# Altium PCB ECE8873_sample.PcbDoc
Units mm, origin at the board's own origin, x right, y up, seen from the top; angles counter-clockwise.
Board outline 48.86 x 38.55 mm, 2 copper layers (Top Layer, Bottom Layer); 24 components, 17 nets, 162 pads, 46 vias.
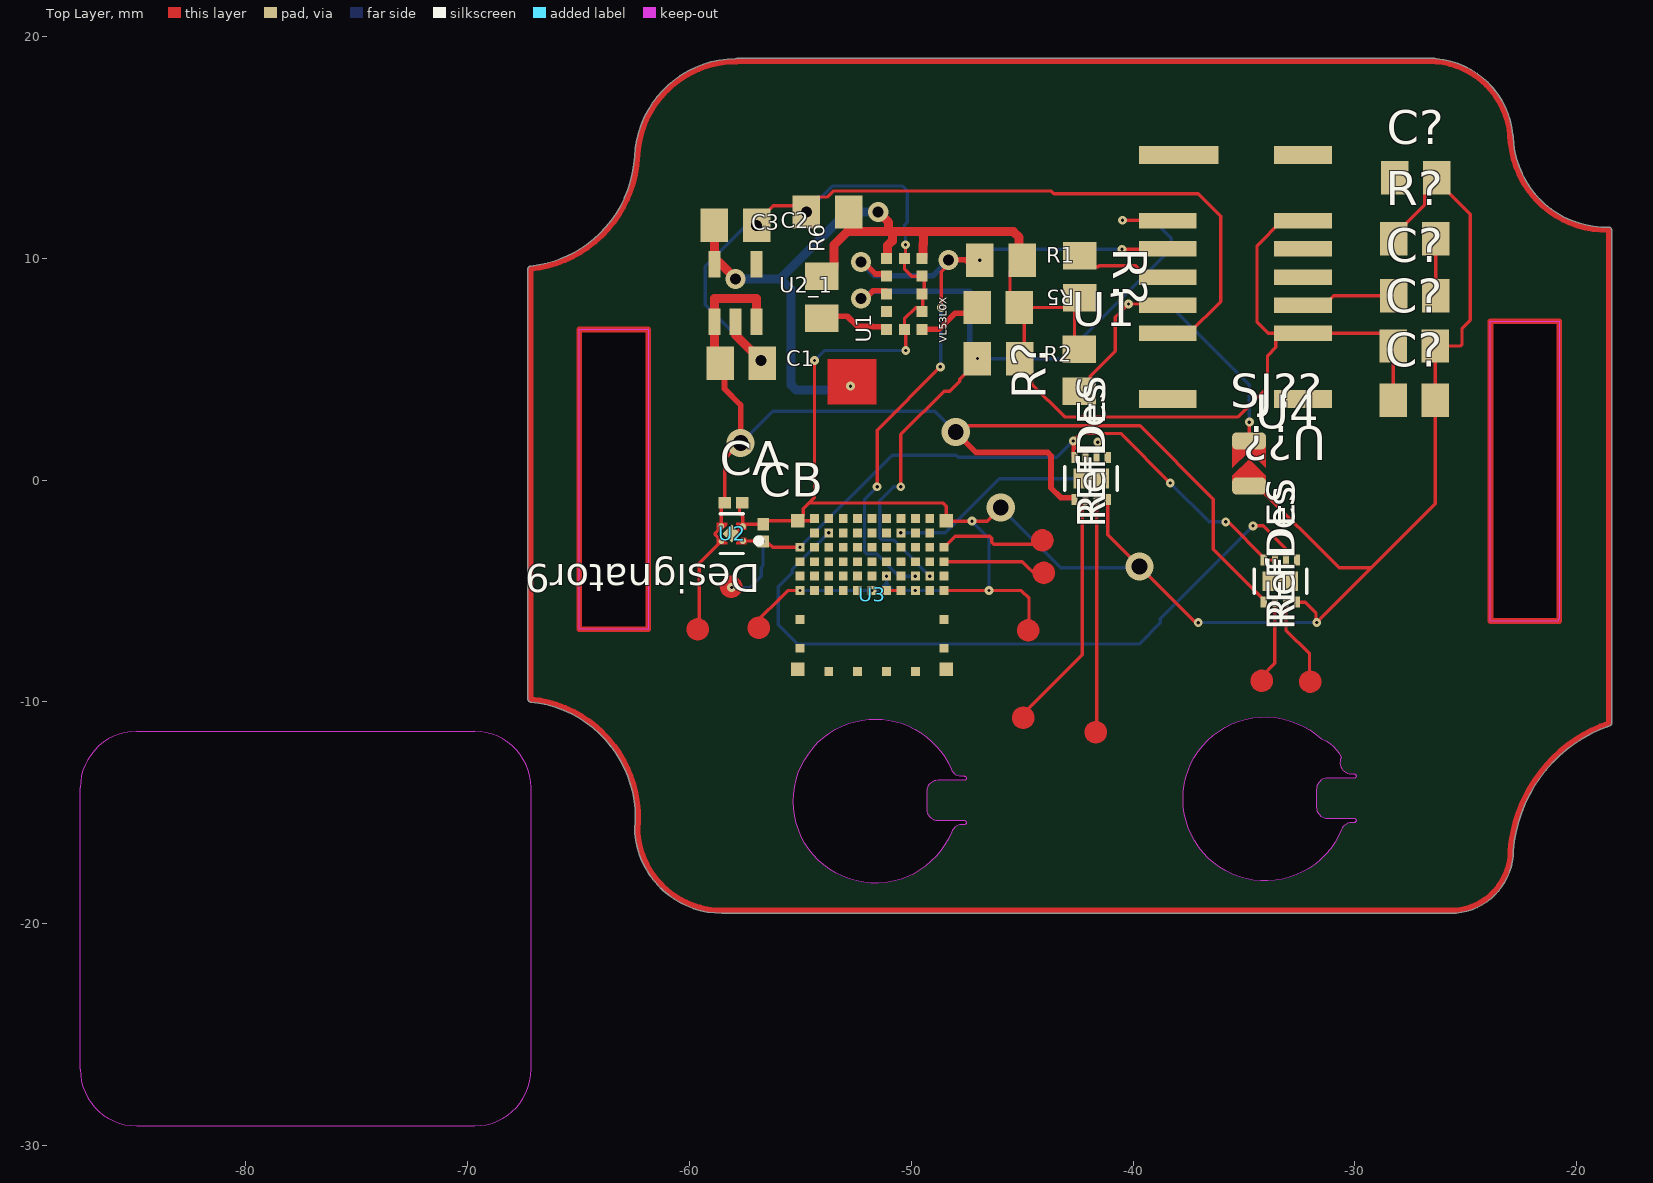
[diagram p0: Top Layer view]
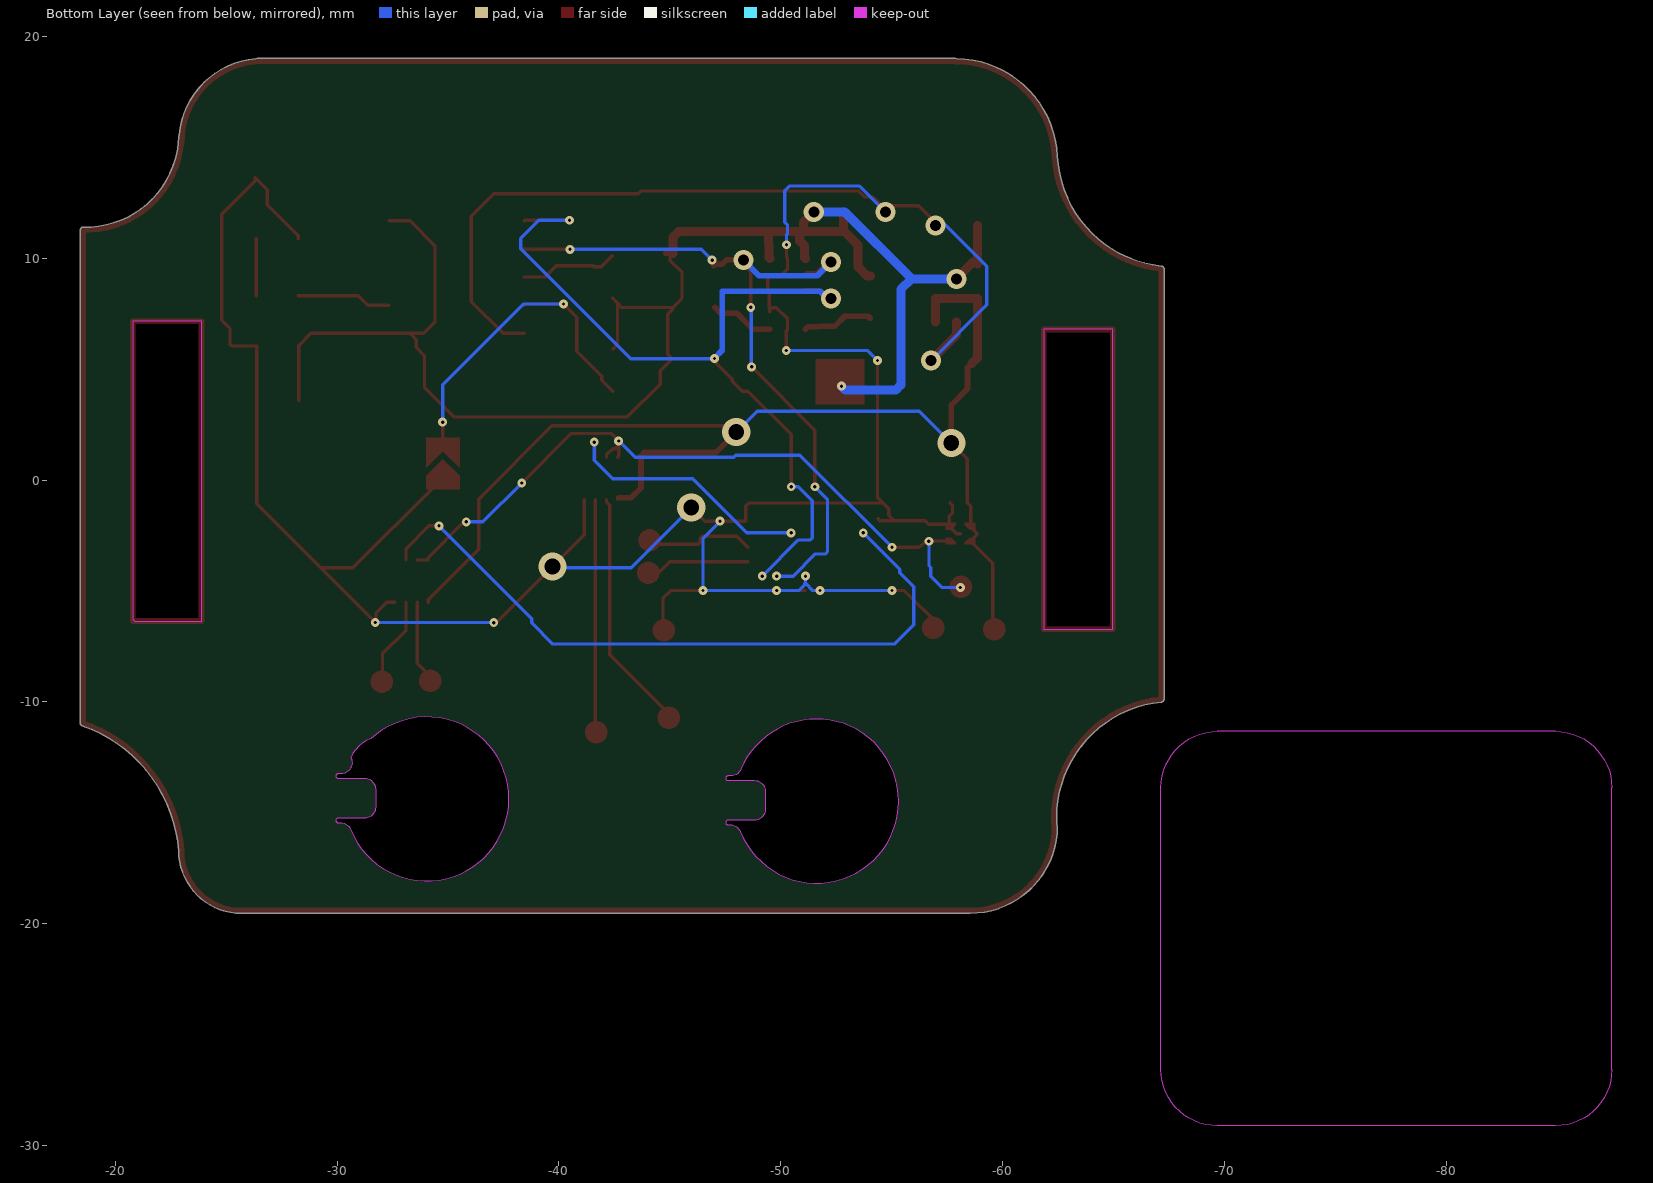
[diagram p1: Bottom Layer view, seen from below]

## Layer stack, top to bottom
Top Solder: solder mask 0.0102, Solder Resist, Dk 3.5
Top Layer: signal copper 0.0356
Dielectric 1: dielectric 0.32, FR-4, Dk 4.8
Bottom Layer: signal copper 0.0356
Bottom Solder: solder mask 0.0102, Solder Resist, Dk 3.5

## Board outline
-62.438,-15.219 ccw(c-67.678,-15.219) -67.164,-10.003 cw(c-67.152,-9.876) -67.279,-9.876 -67.279,9.521 cw(c-67.152,9.521) -67.164,9.648 ccw(c-67.715,14.868) -62.472,14.603 cw(c-57.866,14.386) -57.935,18.997 -57.866,19.017 -26.403,19.017 -26.336,18.998 cw(c-26.661,15.218) -22.882,15.56 -22.862,15.494 ccw(c-18.664,15.599) -18.56,11.401 cw(c-18.556,11.274) -18.429,11.274 -18.429,-10.91 -18.422,-10.949 cw(c-18.55,-10.949) -18.508,-11.07 ccw(c-16.368,-17.223) -22.862,-16.71 cw(c-25.687,-16.705) -25.687,-19.53 -25.722,-19.525 -58.539,-19.525 cw(c-58.539,-15.592) -62.472,-15.592 -62.446,-15.514 ccw(c-67.677,-15.219)
cut-out: -64.965,6.792 -61.863,6.792 -61.863,-6.726 -64.965,-6.726
cut-out: -23.891,7.164 -20.789,7.164 -20.789,-6.249 -20.784,-6.254 -20.884,-6.354 -23.891,-6.354
cut-out: -31.236,-15.241 -30.045,-15.241 cw(c-30.045,-15.341) -29.945,-15.341 cw(c-30.045,-15.341) -30.045,-15.441 -30.148,-15.441 ccw(c-30.148,-15.941) -30.612,-15.754 cw(c-34.045,-14.372) -35.245,-10.872 cw(c-34.045,-14.372) -31.52,-11.668 cw(c-32.009,-13.096) -30.618,-12.509 ccw(c-30.174,-12.741) -30.174,-13.241 -30.045,-13.241 cw(c-30.045,-13.341) -29.945,-13.341 cw(c-30.045,-13.341) -30.045,-13.441 -31.236,-13.441 ccw(c-31.236,-13.941) -31.736,-13.941 -31.736,-14.741 ccw(c-31.236,-14.741)
cut-out: -48.807,-15.338 -47.617,-15.338 cw(c-47.617,-15.438) -47.517,-15.438 cw(c-47.617,-15.438) -47.617,-15.538 -47.72,-15.538 ccw(c-47.72,-16.038) -48.184,-15.851 cw(c-51.616,-14.469) -52.816,-10.969 cw(c-51.616,-14.469) -50.416,-10.969 cw(c-51.616,-14.469) -48.207,-13.032 ccw(c-47.746,-12.838) -47.746,-13.338 -47.617,-13.338 cw(c-47.617,-13.438) -47.517,-13.438 cw(c-47.617,-13.438) -47.617,-13.538 -48.807,-13.538 ccw(c-48.807,-14.038) -49.307,-14.038 -49.307,-14.838 ccw(c-48.807,-14.838)

## Design rules (kind name [scope] priority, off if disabled: settings)
BoardOutlineClearance [All] p1: gap=0.2 ignorepadtopadclearanceinfootprint=FALSE
Clearance [All] p1: gap=0.12 ignorepadtopadclearanceinfootprint=TRUE
ComponentClearance [All] p1: gap=0.127 collisioncheckmode=3 verticalgap=0.127 showdistances=TRUE
DiffPairsRouting [All] p1: maxlimit=0.254 minlimit=0.127 mostfreqgap=0.127 toplayer_minwidth=0.127 toplayer_maxwidth=25.4 toplayer_prefwidth=0.127 bottomlayer_minwidth=0.127 bottomlayer_maxwidth=25.4 bottomlayer_prefwidth=0.127 maxuncoupledlength=12.7
Height [All] p1: minheight=0 maxheight=1816.048 prefheight=12.7
HoleSize [All] p1: absolutevalues=TRUE maxlimit=6.3 minlimit=0.15 maxpercent=80.000 minpercent=20.000
HoleToHoleClearance [All] p1: gap=0.254 allowstackedmicrovias=FALSE
MinimumAnnularRing [All] p1: minimumring=0.1
MinimumSolderMaskSliver [All] p1: minsoldermaskwidth=0.15
PlaneClearance [All] p1: clearance=0.127
PlaneConnect PlaneConnectPowerPads [InPadClass('PowerPads')] p1: planeconnectstyle=Direct reliefexpansion=0.508 reliefentries=4 reliefconductorwidth=0.254 reliefairgap=0.254
PlaneConnect [All] p2: pad.planeconnectstyle=Relief pad.reliefexpansion=0.3 pad.reliefentries=4 pad.reliefconductorwidth=0.127 pad.reliefairgap=0.127 via.planeconnectstyle=Direct via.reliefexpansion=0.3 via.reliefentries=4 via.reliefconductorwidth=0.127 via.reliefairgap=0.127
PolygonConnect PolygonConnectPowerPads [All vs (InPadClass('PowerPads'))] p1: connectstyle=Direct reliefconductorwidth=0.254 reliefentries=4 polygonreliefangle="90 Angle" airgapwidth=0.254
PolygonConnect [All] p2: thpad.connectstyle=Relief thpad.reliefconductorwidth=0.127 thpad.reliefentries=4 thpad.polygonreliefangle="90 Angle" thpad.airgapwidth=0.127 smdpad.connectstyle=Relief smdpad.reliefconductorwidth=0.127 smdpad.reliefentries=4 smdpad.polygonreliefangle="90 Angle" smdpad.airgapwidth=0.127 via.connectstyle=Direct via.reliefconductorwidth=0.127 via.reliefentries=4 via.polygonreliefangle="90 Angle" via.airgapwidth=0.127
RoutingVias [All] p1: holewidth=0.3 width=0.6 viastyle="Through Hole" minholewidth=0.3 minwidth=0.6 maxholewidth=0.6 maxwidth=6.6
SilkToSilkClearance [All] p1: silktosilkclearance=0.127
SilkToSolderMaskClearance [IsPad] p1: minsilkscreentomaskgap=0.127 clearancetoexposedcopper=TRUE
SolderMaskExpansion SolderMaskExpansion_1 [IsVia] p1: expansion=0.102 istentingtop=TRUE
SolderMaskExpansion [All] p2: expansion=0 istentingtop=FALSE
SupplyNets "Schematic Supply Nets_2" [InNet('VIN')] p1: voltage=0.000
SupplyNets "Schematic Supply Nets_1" [InNet('2.8V')] p2: voltage=0.000
SupplyNets "Schematic Supply Nets" [InNet('GND')] p3: voltage=0.000
UnRoutedNet [All] p1: checkbadconnections=TRUE
Width Width_10mil [All] p1: maxlimit=25.4 minlimit=0.15 preferedwidth=0.15 minimp=50.000000 maximp=50.000000 favimp=50.000000
Width Width_6mil [All] p2: maxlimit=25.4 minlimit=0.152 preferedwidth=0.152 minimp=50.000000 maximp=50.000000 favimp=50.000000
Width Power_20mil [All] p3: maxlimit=25.4 minlimit=0.508 preferedwidth=0.508 minimp=50.000000 maximp=50.000000 favimp=50.000000
Width Power_12mil [All] p4: maxlimit=25.4 minlimit=0.305 preferedwidth=0.305 minimp=50.000000 maximp=50.000000 favimp=50.000000
Width Width_5mil [All] p5: maxlimit=25.4 minlimit=0.127 preferedwidth=0.127 minimp=50.000000 maximp=50.000000 favimp=50.000000
19 further rules are at their usual default settings.

## Classes and differential pairs
component class ECE8873_sample: 32 C1 C2 C3 C? CA CB R1 R2 R5 R6 R? SJ?? SWDCLK SWDIO U1 U2 U2_1 U3 U4 U??

## Components (designator, comment, footprint, x,y, rotation, side; value= is the part's Value field where it differs from the comment)
C1 "10µF" 0805-NO -57.667,5.262 r0 top
C2 "10µF" 0805-NO -57.921,11.485 r0 top
C3 "0.1uF" 0805-NO -53.776,12.086 r180 top
C? "2.2uF" 0805-NO -27.263,13.631 r0 top
C? "10uF" 0805-NO -27.327,6.043 r0 top
C? "1uF" 0805-NO -27.306,8.313 r0 top
C? "0.1uF" 0805-NO -27.327,3.6 r0 top
CA "Capacitor 1 uF +/- 10% 6.3 V 0402" CAPC1005X55X25LL05T10 -58.016,-1.023 r180 top value=1µF
CB "Capacitor 1 uF +/- 10% 6.3 V 0402" CAPC1005X55X25LL05T10 -56.663,-2.377 r270 top value=1µF
R1 "10K" 0805-NO -45.955,9.915 r0 top
R2 "10K" 0805-NO -46.067,5.465 r0 top
R5 "10K" 0805-NO -46.086,7.78 r0 top
R6 "10K" 0805-NO -54.035,8.245 r90 top
R? "22" 0805-NO -27.306,10.885 r0 top
R? "10K" 0805-NO -42.407,9.162 r270 top
R? "10K" 0805-NO -42.427,4.959 r90 top
SJ?? "ADDR" SOLDERJUMPER_ARROW_NOPASTE -34.774,0.75 r90 top
U1 "DRV8837CDSGR" DSG8_P9X1P6_TEX -41.895,0.074 r90 top
U1 "VL53L0X" LGA12_ST -50.307,8.397 r90 top
U2 "TPS7A0230PDQNR" DQN0004A-MFG -58.1,-2.412 r180 top
U2_1 "MIC5225_2.8V" SOT23-5 -57.921,8.437 r0 top
U3 "ISP1807" ISP2053-AX -51.767,-5.178 r0 top
U4 "DRV8837CDSGR" DSG8_P9X1P6_TEX -33.357,-4.553 r90 top
U?? "AMG8833" AMG8833 -35.39,9.153 r270 top

## Footprints (in the part's own frame and the unit in brackets; to place one, negate y for a bottom-side part, rotate by r counter-clockwise, add the part's x,y. Pads: shape width x height; smd on the part's side, far side on the other; paste and mask are expansions set on the pad)
0805-NO [mm] "0805-NO"
  rect 1.24x1.5 smd: 1(-0.95,0) 2(0.95,0)
AMG8833 [mil] "AMG8833"
  rect 31.5x141.73 smd: 1(-216.54,-100.39)
  rect 27.56x102.36 smd: 2(-100,-120.08) 3(-50,-120.08) 4(0,-120.08) 5(50,-120.08) 6(100,-120.08) 9(100,120.08) 10(50,120.08) 11(0,120.08) 12(-50,120.08) 13(-100,120.08)
  rect 31.5x102.36 smd: 7(216.54,-120.08) 8(216.54,120.08) 14(-216.54,120.08)
CAPC1005X55X25LL05T10 [mm] "Chip Capacitor, 2-Leads, Body 1.05x0.55mm, IPC High Density"
  rect 0.56x0.52 smd: 1(-0.39,0) 2(0.39,0)
  body extent -0.53,-0.28 0.53,0.28, height 0.55
DQN0004A-MFG [mm]
  round 0.279 smd paste-0.127: 1(-0.505,0.33) 2(-0.505,-0.33)
  round 0.251 smd paste-0.113: 3(0.459,-0.346) 4(0.459,0.346)
  rect 0.58x0.58 smd rot 135 paste-0.277: 5(0,0)
  Top Layer region: -0.66,0.175 -0.66,0.485 -0.2,0.485 -0.2,0.385 -0.41,0.175
  Top Layer region: 0.66,-0.175 0.66,-0.485 0.2,-0.485 0.2,-0.385 0.41,-0.175
  Top Layer region: 0.66,0.175 0.66,0.485 0.2,0.485 0.2,0.385 0.41,0.175
  Top Layer region: -0.66,-0.175 -0.66,-0.485 -0.2,-0.485 -0.2,-0.385 -0.41,-0.175
  silkscreen extent -1.35,-0.9 0.52,0.9
DSG8_P9X1P6_TEX [mm]
  rect 0.5x0.28 smd paste-0.14 mask+0: 1(-0.95,0.75) 2(-0.95,0.25) 3(-0.95,-0.25) 4(-0.95,-0.75) 5(0.95,-0.75) 6(0.95,-0.25) 7(0.95,0.25) 8(0.95,0.75)
  rect 0.889x1.6 smd paste-0.787 mask-0.787: 9(0,0)
  Top Layer region: 0,0.8 0,0.8 0,0.8 0,0.8 0,0.8 0,0.8 0,0.8 0,0.8
  Top Layer region: 0,-0.8 0,-0.8 0,-0.8 0,-0.8 0,-0.8 0,-0.8 0,-0.8 0,-0.8
  silkscreen extent -0.54,-1.18 0.54,1.18, body extent -1.05,-1.05 1.05,1.05, height 0.54
ISP2053-AX [mm] "Insight SiP BLE module all pins"
  rect 0.6x0.6 smd: A1(-3.35,3.35) A11(3.35,3.35) L1(-3.35,-3.35) L11(3.35,-3.35)
  rect 0.4x0.4 smd: A2(-2.6,3.45) A3(-1.95,3.45) A4(-1.3,3.45) A5(-0.65,3.45) A6(0,3.45) A7(0.65,3.45) A8(1.3,3.45) A9(1.95,3.45) A10(2.6,3.45) B2(-2.6,2.8) B3(-1.95,2.8) B4(-1.3,2.8) B5(-0.65,2.8) B6(0,2.8) B7(0.65,2.8) B8(1.3,2.8) B9(1.95,2.8) B10(2.6,2.8) C1(-3.25,2.15) C2(-2.6,2.15) C3(-1.95,2.15) C4(-1.3,2.15) C5(-0.65,2.15) C6(0,2.15) C7(0.65,2.15) C8(1.3,2.15) C9(1.95,2.15) C10(2.6,2.15) C11(3.25,2.15) D1(-3.25,1.5) D2(-2.6,1.5) D3(-1.95,1.5) D4(-1.3,1.5) D5(-0.65,1.5) D6(0,1.5) D7(0.65,1.5) D8(1.3,1.5) D9(1.95,1.5) D10(2.6,1.5) D11(3.25,1.5) E1(-3.25,0.85) E2(-2.6,0.85) E3(-1.95,0.85) E4(-1.3,0.85) E5(-0.65,0.85) E6(0,0.85) E7(0.65,0.85) E8(1.3,0.85) E9(1.95,0.85) E10(2.6,0.85) E11(3.25,0.85) F1(-3.25,0.2) F2(-2.6,0.2) F3(-1.95,0.2) F4(-1.3,0.2) F5(-0.65,0.2) F6(0,0.2) F7(0.65,0.2) F8(1.3,0.2) F9(1.95,0.2) F10(2.6,0.2) F11(3.25,0.2) H1(-3.25,-1.1) H11(3.25,-1.1) K1(-3.25,-2.4) K11(3.25,-2.4) L3(-1.95,-3.45) L5(-0.65,-3.45) L7(0.65,-3.45) L9(1.95,-3.45)
  body extent -4.01,-4.01 4.01,4.01, height 0.59
LGA12_ST [mil] "LGA12_ST"
  rect 19.69x19.69 smd: 1(62.99,-31.5) 2(31.5,-31.5) 3(0,-31.5) 4(-31.5,-31.5) 5(-62.99,-31.5) 6(-62.99,0) 7(-62.99,31.5) 8(-31.5,31.5) 9(0,31.5) 10(31.5,31.5) 11(62.99,31.5) 12(62.99,0)
SOLDERJUMPER_ARROW_NOPASTE [mil] "SOLDERJUMPER_ARROW_NOPASTE"
  rrect50% 30x60 smd paste+0 mask+0: 1(-40,0) 2(40,0)
  Top Layer region: -7.36,30 21.61,0 -7.36,-30 46,-30 46,30
  Top Layer region: -46,30 -22.09,30 7.91,0 -22.09,-30 -46,-30
SOT23-5 [mm] "SOT23-5"
  rect 0.55x1.2 smd: 1(-0.95,-1.3) 2(0,-1.3) 3(0.95,-1.3) 4(0.95,1.3) 5(-0.95,1.3)

## Part data
C1 C2 C3 C? C? C? C?: library part CAP_CERAMIC0805-NOOUTLINE, "Ceramic Capacitors   For new designs, use the packages preceded by an '_' character since they are more reliable:   The following footprints should be used on most boards: _0402 - Standard footprint for regular board layouts  _0603 - Standard footprint for regular board layouts  _0805 - Standard footprint for regular board layouts  _1206 - Standard footprint for regular board layouts       For extremely tight-pitch boards where space is at a premium, the following 'micro-pitch' footprints can be used (smaller pads, no silkscreen outline, etc.): _0402MP - Micro-pitch footprint for very dense/compact boards  _0603MP - Micro-pitch footprint for very dense/compact boards  _0805MP - Micro-pitch footprint for very dense/compact boards  _1206MP - Micro-pitch footprint for very dense/compact boards", DeviceName=0805-NOOUTLINE, DeviceSetName=CAP_CERAMIC, GateName_1=G$1, LibraryName=microbuilder, SymbolName_1=CAPACITOR
CA CB: library part CMP-001-00008-6, "Chip Capacitor, 1 uF, +/- 10%, 6.3 V, 0402 (1005 Metric)", Capacitor Type=Ceramic, Case/Package=0402, Max Operating Temperature=85°C, Min Operating Temperature=-55°C, Tolerance=10%, Voltage Rating=6.3V, Mounting Technology=SM, Pins=2, RoHS Compliant=True
R1 R2 R5 R6 R? R? R?: library part RESISTOR0805_NOOUTLINE, "Resistors   For new designs, use the packages preceded by an '_' character since they are more reliable:   The following footprints should be used on most boards: _0402 - Standard footprint for regular board layouts  _0603 - Standard footprint for regular board layouts  _0805 - Standard footprint for regular board layouts  _1206 - Standard footprint for regular board layouts       For extremely tight-pitch boards where space is at a premium, the following 'micro-pitch' footprints can be used (smaller pads, no silkscreen outline, etc.): _0402MP - Micro-pitch footprint for very dense/compact boards  _0603MP - Micro-pitch footprint for very dense/compact boards  _0805MP - Micro-pitch footprint for very dense/compact boards  _1206MP - Micro-pitch footprint for very dense/compact boards", DeviceName=0805_NOOUTLINE, DeviceSetName=RESISTOR, GateName_1=G$1, LibraryName=microbuilder, SymbolName_1=RESISTOR
SJ??: library part SOLDERJUMPER, "SMD Solder JUMPER   Solder the two pads together to create a connection, or remove the solder to break it.REFLOW - Use this footprint for solder paste and reflow ovens. WAVE - Use this footprint for hand-soldering (larger pads).    CLOSED - Has a trace between the two pads to ensure it is closed by default.  The trace needs to be cut to disable the jumper, and can be closed again by creating a solder bridge between the two pads.", BOM=EXCLUDE, DeviceSetName=SOLDERJUMPER, GateName_1=1, LibraryName=microbuilder, SymbolName_1=SOLDERJUMPER
U1 U4: "12-V, 1-A H-bridge motor driver 8-WSON -40 to 85", Manufacturer_Name="Texas Instruments", Copyright="Copyright (C) 2025 Ultra Librarian. All rights reserved.", Datasheet=https://www.ti.com/lit/gpn/drv8837c, Manufacturer_Part_Number=DRV8837CDSGR, RefDes=RefDes, TYPE=Type
U1: "VL53L0X - Laser Time of Flight Sensor (2M range)", VDD:Op.Temp="VDD:  / Op. Temp:", DeviceSetName=VL53L0X, GateName_1=G$1, LibraryName=microbuilder, SymbolName_1=VL53L0X
U2: "No Description Available", Mfr_Name="Texas Instruments", RefDes=RefDes, TYPE=TYPE
U2_1: library part VREG_SOT23-5, "SOT23-5 Fixed Voltage Regulators      Part	Current Out	V Out	V In	V Dropout	Î¸JA (Â°C/W)	TJ (Â°C)	Digikey Part No.	     ADP121	  150mA	  3.3V	  3.4-5.5V	  0.09V @ 150mA	  --	  --	  ADP121-AUJZ33R7CT-ND	     ADP121	  150mA	  3.0V	  3.1-5.5V	  0.09V @ 150mA	  --	  --	  ADP121-AUJZ30R7CT-ND	     ADP122	  300mA	  3.3V	  3.4-5.5V	  0.085V @ 300mA	  --	  --	  ADP122AUJZ-3.3-R7CT-ND	     ADP1712	  300mA	  3.3V	  3.5-5.5V	  0.17V @ 300mA	  --	  --	  ADP1712AUJZ-3.3-R7TR-ND	     AP7311 (Low Cost)	  150mA	  3.3V	  3.5-6V	  0.15V @ 150mA	  --	  --	  AP7311-33WG-7DICT-ND	     LD39015M18R	  150mA	  1.8V	  1.9V-5.5V	  0.08V @ 100mA	  --	  --	  497-6977-1-ND	     LP2985A-33DBVR	  150mA	  3.3V	  3.3-16V	  0.28V @ 150mA	  206	  150	  296-18479-1-ND	     MCP1824T-3302E/OT	  300mA	  3.3V	  3.5V-6V	  0.2V @ 300mA	  --	  --	  MCP1824T-3302E/OTCT-ND	     MIC5205-2.5YM5 TR	  150mA	  2.5V	  2.7-16V	  0.165V @ 150mA	  --	  --	  576-1257-2-ND	     MIC5205-3.0YM5 TR	  150mA	  3.0V	  3.2V-16V	  0.165V @ 150mA	  --	  --	  576-1258-2-ND	     MIC5205-3.3YM5 TR	  150mA	  3.3V	  3.5V-16V	  0.165V @ 150mA	  --	  --	  576-1259-2-ND	     TPS780330220	  150mA	  3.3V+2.2V	  3.6-5.5V	  250mV Max	  --	  --	  296-23332-1-ND	     TDA3663/N1,135	  100mA	  3.3V	  3.5-45V	  0.18V @ 50mA	  --	  --	  568-5343-1-ND	     	  	  	  	  	  	  	  	     	  	  	  	  	  	  	  	   Max operating temp can be calculated using Î¸JA, TJ (max junction temperature), and power in watts.  Set the \"Maximum Ambient Temperature\" until it reaches TJ (\"Max Junction Temperature\"), which is the absolute limit for safe use of the regulator: Heat Sink Temperature Calculator   For example, With 12V source into a 3.3V LP2985 and a 30mA load, we are dissipating (12V-3.3V) * 0.03A = 0.261W.  With a Î¸JA of 206 Â°C/W, a TJ of 150Â°C, and 261mW we can safely use the chip without a heat sink up to 75Â°C (=147.1Â°C Junction Temperature).", DeviceSetName=VREG_SOT23-5, GateName_1=G$1, LibraryName=microbuilder, SymbolName_1=VREG_SOT23-5
U3: library part ISP2053_Pinout_New, "ISP Smart Bluetooth Module", BOI="QFN 8 x 8", BOI-Metric="QFN 8 x 8", DESIG="BLE Module", FAB="Insight SiP", ISP_PART=ISP1807
U??: "AMG8833 8x8 IR Grid Sensor    Viewing Angle: ~60Â°  Temp Accuracy: +/-2-3Â°C (high/low gain)", VDD:3.3-5V
Op.Temp:0~80Â°C="VDD: 3.3-5V  / Op. Temp: 0~80Â°C", DeviceSetName=AMG8833, GateName_1=G$1, LibraryName=microbuilder, SymbolName_1=AMG8833

## Via types
v1: diameter 0.4, hole 0.15, Top Layer to Bottom Layer, tented both sides, 33 vias
v2: diameter 0.907, hole 0.5, Top Layer to Bottom Layer, tented both sides, 8 vias
v3: diameter 1.27, hole 0.711, Top Layer to Bottom Layer, tented both sides, 4 vias
v4: diameter 0.4, hole 0.15, Top Layer to Bottom Layer, 1 vias

## Nets (pads, with @x,y where several pads share a name; then routed paths per layer and width w, separated by ;. In a path a pad name is that pad's centre, name@x,y a point inside that pad or via, vN(x,y) a via of type N, cw(c..) or ccw(c..) an arc to the next point about the centre after c; other vN are vias at no path point)
2.8V: C2.1 C3.1 C?.1@-28.277,3.6 C?.1@-28.277,6.043 R1.2 R2.2 R5.2 R6.2 R?.2@-42.407,8.212 R?.2@-42.427,5.909 U1.1@-49.507,9.997 U1.11 U2_1.5 U??.9 U??.13 | length 76.5
  Top Layer w0.15: R5.2@-45.136,7.71 -44.912,7.486 -44.912,5.67 R2.2 -44.572,4.92 -44.572,4.327 -43.092,2.847 -35.268,2.847 -33.94,4.175 -33.94,5.603 -33.565,5.978 -33.565,6.338 -33.29,6.613 U??.9 ; R1.2@-45.005,10.22 R1.2 -45.55,9.37 -45.55,8.194 R5.2 -42.839,7.78 R?.2@-42.644,7.975 ; R?.2@-42.427,5.909 -42.644,6.126 R?.2@-42.644,7.975 ; R?.2@-42.407,8.212 R?.2@-42.644,7.975 ; U??.13 -33.29,11.693 -34.414,10.569 -34.414,7.111 -33.916,6.613 U??.9 ; C?.1@-28.277,3.6 -28.277,6.043 -28.277,6.068 -28.822,6.613 U??.9
  Top Layer w0.254: R1.2@-45.005,10.22 R1.2@-44.83,10.22
  Top Layer w0.406: U2_1.5 U2_1.5@-58.871,9.834 ; C2.1 U2_1.5@-58.871,9.888 ; v2(-57.921,9.072) -58.683,9.834 U2_1.5@-58.871,9.834 ; R6.2 -53.905,9.195 -53.488,9.612 -53.488,10.596 -52.826,11.258 ; C3.1 -52.826,11.258 ; v2(-51.49,12.086) -51.02,11.616 -51.02,11.197 -52.765,11.197 -52.826,11.258 ; U1.11 -51.06,10.044 -51.06,10.582 -50.855,10.787 -50.855,11.197 -49.585,11.197 ; U1.1@-49.507,9.997 -49.46,10.044 -49.46,10.651 -49.458,10.653 -49.458,11.07 -49.585,11.197 ; R1.2@-45.14,10.22 -45.14,10.943 -45.394,11.197 -49.585,11.197 ; U2_1.5@-58.871,9.834 -58.925,9.834 U2_1.5@-58.871,9.888 ; U2_1.5@-58.871,9.834 U2_1.5@-58.871,9.888
  Bottom Layer w0.406: v2(-57.921,9.072) -55.897,9.072 ; v1(-52.736,4.235) -52.912,4.059 -55.181,4.059 -55.419,4.297 -55.419,8.594 -55.897,9.072 ; v2(-51.49,12.086) -52.883,12.086 -55.897,9.072
GND: C1.2 C2.2 C3.2 C?.2@-26.313,13.631 C?.2@-26.377,3.6 C?.2@-26.377,6.043 CA.1 CB.1 R?.1@-28.256,10.885 SJ??.1 U1.2@-49.507,9.197 U1.3@-49.507,8.397 U1.4 U1.6@-50.307,6.797 U1.12 U2.2 U2.5 U2_1.2 U3.A1 U3.A2 U3.A11 U3.E7 U3.F1 U3.F6 U3.F9 U3.F11 U4.4 U??.6 | length 158
  Top Layer w0.15: U2.5 -57.925,-2.412 U2.2 ; CA.1 -57.741,-1.138 -57.741,-1.487 -57.595,-1.633 U2.2 ; -57.206,-6.62 -55.564,-4.978 v1(-55.017,-4.978) ; v2(-56.971,11.485) -56.971,11.615 -56.214,12.372 -55.012,12.372 v2(-54.726,12.086) -54.726,12.216 -54.181,12.761 -53.797,12.761 -53.527,13.031 -43.691,13.031 -43.566,12.906 -37.066,12.906 -36.053,11.893 -36.053,8.05 -37.49,6.613 U??.6 ; U3.A2 -54.467,-1.828 U3.A1 ; v4(-54.365,5.39) -54.365,-0.79 -54.605,-1.03 ; v1(-50.258,10.608) -50.258,10.046 U1.12 -50.307,9.522 -49.982,9.197 -49.507,9.197 -49.42,9.11 -49.42,8.484 -49.507,8.397 -49.481,8.371 U1.4@-49.481,7.777 ; v1(-50.248,5.841) -50.248,6.738 -50.307,6.797 -50.307,7.272 -49.802,7.777 -49.507,7.777 U1.4@-49.507,7.597 ; U3.F11 v1(-46.498,-4.978) -45.038,-4.978 -44.69,-5.326 -44.69,-6.652 ; v3(-45.962,-1.24) -46.573,-1.851 v1(-47.263,-1.851) -48.394,-1.851 U3.A11 -48.417,-1.185 -48.572,-1.03 -54.605,-1.03 ; U1.4@-41.145,-0.876 -41.145,-2.459 -37.229,-6.375 -37.113,-6.375 v1(-37.065,-6.423) ; SJ??.1 -34.393,-0.266 -30.706,-3.953 -29.259,-3.953 ; U4.4 -32.242,-5.503 -31.755,-5.99 -31.755,-6.381 v1(-31.721,-6.415) -29.259,-3.953 ; R?.1@-28.256,10.885 -28.256,11.015 -26.858,12.413 -26.858,13.086 -26.313,13.631 -26.313,13.501 -24.795,11.983 -24.795,7.214 -25.173,6.836 -25.173,6.131 -25.261,6.043 -26.377,6.043 -26.377,3.6 -26.377,-1.071 -29.259,-3.953 ; U2.2 -57.56,-2.082 -57.465,-1.987 CB.1 -56.504,-1.828 U3.A1 ; U3.A1 -54.867,-1.578 -54.867,-1.292 -54.605,-1.03
  Top Layer w0.406: U2_1.2 -57.921,6.532 C1.2@-56.905,5.516 ; C1.2 -56.905,5.262 C1.2@-56.905,5.516 ; C1.2@-56.651,5.262 v2(-56.778,5.389) C1.2@-56.905,5.516
  Bottom Layer w0.15: v2@-56.971,11.55 -57.366,11.55 -59.285,9.631 -59.285,7.896 v2(-56.778,5.389) ; v1(-55.017,-4.978) v1(-51.767,-4.978) -51.446,-4.978 -51.117,-4.649 v1(-51.117,-4.328) ; v2(-54.726,12.086) -53.554,13.258 -50.393,13.258 -50.18,13.045 -50.18,11.618 -50.307,11.491 -50.307,11.108 -50.258,11.059 v1(-50.258,10.608) ; v4(-54.365,5.39) -53.914,5.841 v1(-50.248,5.841) ; -51.086,-4.649 -51.086,-4.707 -50.815,-4.978 v1(-49.817,-4.978) v1(-46.498,-4.978) -46.498,-2.616 v1(-47.263,-1.851) ; v3(-45.962,-1.24) -43.255,-3.947 -39.771,-3.947 v3(-39.714,-3.89) ; v1(-37.065,-6.423) -37.061,-6.419 -31.725,-6.419 v1(-31.721,-6.415)
GPIO: R6.1 U1.7@-51.107,6.797 | length 3.2
  Top Layer w0.254: R6.1 -53.943,7.387 -52.887,7.387 -52.43,6.93 -51.744,6.93 -51.734,6.92 -51.23,6.92 U1.7@-51.107,6.797
H-BR: U1.6@-41.645,1.024 U3.B8 | length 11.8
  Top Layer w0.15: U1.6@-41.645,1.024 -41.618,1.051 -41.618,1.683 v1(-41.591,1.71)
  Bottom Layer w0.15: v1(-50.467,-2.378) -48.469,-2.378 -46.035,0.056 -42.421,0.056 -41.591,0.886 v1(-41.591,1.71)
H-BR-IR: U4.6 | length 31.6
  Top Layer w0.15: v1(-34.592,-2.063) -34.135,-2.063 -33.107,-3.091 U4.6
  Bottom Layer w0.15: v1(-53.717,-2.378) -55.365,-4.026 -55.365,-4.175 -56.002,-4.812 -56.002,-6.514 -55.127,-7.389 -39.724,-7.389 -38.77,-6.435 -38.77,-6.241 v1(-34.592,-2.063)
INT: R?.1@-42.407,10.112 U??.4 | length 4.4
  Top Layer w0.15: R?.1@-42.407,10.112 -41.916,9.621 -41.577,9.621 -41.54,9.658 -39.878,9.658 -39.665,9.445 -39.665,9.428 -39.39,9.153 U??.4
N$4: U3.F7 U3.F8 | length 0.7
  Top Layer w0.15: U3.F7 U3.F8
NetC?_1: C?.1@-28.256,8.313 U??.10 | length 4.3
  Top Layer w0.15: U??.10 -31.39,7.883 -30.96,8.313 C?.1@-28.256,8.313
NetC?_2: C?.2@-26.356,8.313 R?.2@-26.356,10.885 | length 2.6
  Top Layer w0.15: C?.2@-26.356,8.313 R?.2@-26.356,10.885
NetR?_1: R?.1@-42.427,4.009 SJ??.2 U??.5 | length 16.1
  Top Layer w0.15: R?.1@-42.427,4.009 -41.933,4.503 -41.933,4.684 -40.798,5.819 -40.798,7.345 -40.209,7.934 v1(-40.209,7.936) -38.493,7.936 U??.5 ; SJ??.2 -34.759,1.781 v1(-34.759,2.612)
  Bottom Layer w0.15: v1(-40.209,7.936) -38.401,7.936 -34.759,4.294 v1(-34.759,2.612)
SCL: R1.1 U1.10 U3.E9 U??.3 | length 33.4
  Top Layer w0.15: v1@-51.526,-0.298 -51.54,-0.284 -51.54,2.255 v1(-48.689,5.106) ; v1(-48.645,7.787) -48.645,9.392 -48.315,9.722 v2(-48.315,9.927) ; v1(-40.497,10.401) -38.462,10.401 U??.3
  Top Layer w0.254: v2(-52.257,9.828) -52.149,9.828 -51.613,9.292 U1.10@-51.166,9.292 ; v2(-48.315,9.927) -47.553,9.927 -47.365,9.739 -47.045,9.739 R1.1@-46.979,9.673
  Bottom Layer w0.15: v1(-51.54,-0.298) -52.106,-0.864 -52.106,-3.239 -52.018,-3.327 -51.559,-3.327 -50.558,-4.328 v1(-49.817,-4.328) ; v1(-48.689,5.106) -48.667,5.128 -48.667,7.765 v1(-48.645,7.787) ; v1(-46.905,9.915) -46.419,10.401 v1(-40.497,10.401)
  Bottom Layer w0.254: v2(-52.257,9.828) -51.644,9.215 -49.027,9.215 v2(-48.315,9.927)
SDA: R2.1 U1.9@-51.107,8.397 U3.E10 U??.2 | length 38.5
  Top Layer w0.15: v1(-50.473,-0.298) -50.473,2.057 -48.522,4.008 -48.268,4.008 -47.811,4.465 -47.811,4.541 -47.017,5.335 R2.1 ; v1(-40.479,11.714) -38.461,11.714 U??.2
  Top Layer w0.254: v2(-52.257,8.181) -52.08,8.181 -51.731,8.53 U1.9@-51.128,8.53
  Bottom Layer w0.15: v1(-50.473,-0.298) -50.783,-0.298 -51.42,-0.935 -51.42,-2.61 -51.332,-2.698 -50.797,-2.698 v1(-49.167,-4.328) ; v1@-47.017,5.465 -43.239,5.465 -38.281,10.423 -38.281,10.894 -39.101,11.714 v1(-40.479,11.714)
  Bottom Layer w0.254: v2(-52.257,8.181) -52.112,8.181 -51.782,8.511 -47.365,8.511 -47.365,5.852 -47.017,5.505 v1@-47.017,5.465
  other v1: -47.017,5.485
SWDCLK_1: U3.D11 | length 4.6
  Top Layer w0.15: U3.D11 -44.993,-3.678 -44.259,-4.412
SWDIO_1: U3.C11 | length 5
  Top Layer w0.15: U3.C11 -48.015,-2.526 -46.453,-2.526 -46.365,-2.614 -46.365,-2.798 -46.277,-2.886 -44.019,-2.886
VDD: CB.2 U1.7@-42.145,1.024 U1.8@-42.645,1.024 U2.1 U3.C1 U4.7 U4.8 | length 33.5
  Top Layer w0.15: U2.1 -56.524,-2.742 CB.2@-56.484,-2.782 ; CB.2@-56.484,-2.802 -56.324,-2.962 -56.304,-2.962 -56.238,-3.028 v1(-55.017,-3.028) ; U1.8@-42.645,1.024 -42.693,1.072 v1@-42.693,1.572 ; U1.7@-42.145,1.024 -42.145,1.134 -42.422,1.411 -42.532,1.411 v1@-42.693,1.572 ; v1(-38.324,-0.133) -40.562,2.105 -42.354,2.105 v1(-42.693,1.766) v1@-42.693,1.572 ; v1(-35.821,-1.882) -35.773,-1.93 -35.67,-1.93 -34.1,-3.5 U4.8@-34.1,-3.603 ; U4.8 U4.7
  Bottom Layer w0.15: v1(-58.095,-4.841) -57.273,-4.841 -56.761,-4.329 -56.761,-3.945 -56.686,-3.87 -56.686,-2.763 v1(-56.677,-2.753) ; v1(-55.017,-3.028) -50.867,1.122 -47.973,1.122 -47.875,1.024 -43.435,1.024 v1(-42.693,1.766) ; v1(-38.324,-0.133) -36.575,-1.882 v1(-35.821,-1.882)
VIN: C1.1 CA.2 U1.1@-42.645,-0.876 U2.3 U2.4 U2_1.1 U2_1.3 U4.1 | length 56.2
  Top Layer w0.15: -59.556,-6.762 -59.556,-3.754 U2.4 -58.843,-2.474 -58.843,-2.391 -58.559,-2.107 U2.3@-58.6,-2.066 ; CA.2@-58.564,-1.181 CA.2@-58.559,-1.176 ; U2.3 CA.2@-58.559,-1.176 ; v3(-57.691,1.672) -58.406,0.957 CA.2 CA.2@-58.559,-1.176 ; v3(-47.997,2.166) -47.694,2.166 -47.414,2.446 -39.685,2.446 -36.382,-0.857 -36.382,-3.118 -34.107,-5.393 U4.1 ; U1.1@-42.71,-0.788 -42.645,-0.853 U1.1@-42.645,-0.876
  Top Layer w0.254: C1.1 -58.421,5.066 -58.421,4.116 -57.691,3.386 v3(-57.691,1.672) ; v3(-47.997,2.166) -47.075,1.244 -43.85,1.244 -43.701,1.095 -43.701,-0.349 -43.262,-0.788 U1.1@-42.71,-0.788
  Top Layer w0.406: C1.1 -58.871,5.516 U2_1.1 -58.871,8.183 -56.971,8.183 U2_1.3
  Bottom Layer w0.15: v3(-57.691,1.672) -56.254,3.109 -48.94,3.109 v3(-47.997,2.166)
XSHUT_2.8V: R5.1 U1.5@-49.507,6.797 | length 2.9
  Top Layer w0.254: U1.5@-49.507,6.797 -48.75,6.797 -48.025,7.522 -47.294,7.522 R5.1
pads on no net: C?.1@-28.213,13.631 U1.2@-42.145,-0.876 U1.3@-41.645,-0.876 U1.5@-41.145,1.024 U1.8@-51.107,7.597 U1.9@-41.895,0.074 U2_1.4 U3.A3 U3.A4 U3.A5 U3.A6 U3.A7 U3.A8 U3.A9 U3.A10 U3.B2 U3.B3 U3.B4 U3.B5 U3.B6 U3.B7 U3.B9 U3.B10 U3.C2 U3.C3 U3.C4 U3.C5 U3.C6 U3.C7 U3.C8 U3.C9 U3.C10 U3.D1 U3.D2 U3.D3 U3.D4 U3.D5 U3.D6 U3.D7 U3.D8 U3.D9 U3.D10 U3.E1 U3.E2 U3.E3 U3.E4 U3.E5 U3.E6 U3.E8 U3.E11 U3.F2 U3.F3 U3.F4 U3.F5 U3.F10 U3.H1 U3.H11 U3.K1 U3.K11 U3.L1 U3.L3 U3.L5 U3.L7 U3.L9 U3.L11 U4.2 U4.3 U4.5 U4.9 U??.1 U??.7 U??.8 U??.11 U??.12 U??.14
copper on no net: | length 254.9
  Top Layer w0.15: -44.992,-10.566 -42.299,-7.873 -42.299,-1.139 -42.211,-1.051 ; -42.21,-1.051 -42.145,-0.986 -42.145,-0.876 ; -41.645,-11.27 -41.645,-2.608 -41.645,-0.876 ; -34.279,-8.931 -33.607,-8.259 -33.607,-5.503 ; -33.107,-5.503 -33.107,-6.77 -32.045,-7.832 -32.045,-8.924
  Top Layer w0.254: -62.35,14.386 cw(c-57.866,14.386) -57.866,18.87 ; -62.345,-15.592 ccw(c-58.539,-15.592) -58.539,-19.398 -25.553,-19.398 ; -62.345,14.598 cw(c-67.715,14.868) -67.152,9.521 -67.152,-9.876 cw(c-67.678,-15.219) -62.336,-15.745 ; -57.866,18.89 -26.403,18.89 ; -26.661,18.885 cw(c-26.661,15.218) -22.994,15.218 ; -25.687,-19.403 ccw(c-25.687,-16.705) -22.989,-16.705 cw(c-16.368,-17.223) -18.55,-10.949 ; -22.989,15.491 ccw(c-18.664,15.599) -18.556,11.274 -18.556,-10.931 ; -64.965,-6.726 -61.863,-6.726 -61.863,6.792 -64.965,6.792 -64.965,-6.726 ; -23.891,-6.354 -20.789,-6.354 -20.789,7.164 -23.891,7.164 -23.891,-6.354

## Keep-outs
Keep-Out Layer:
  lines w0: -87.461,-26.566 ccw(c-84.921,-26.566) -84.921,-29.106 -69.681,-29.106 ccw(c-69.681,-26.566) -67.141,-26.566 -67.141,-13.866 ccw(c-69.681,-13.866) -69.681,-11.326 -84.921,-11.326 ccw(c-84.921,-13.866) -87.461,-13.866 -87.461,-26.566

## Other copper
Top Layer:
  rectangle net 2.8V: -53.778,3.414 -51.563,5.462
  region: -32.518,-9.082 cw(c-32.018,-9.082) -32.018,-8.582 cw(c-32.018,-9.082) -31.518,-9.082 cw(c-32.018,-9.082) -32.018,-9.582 cw(c-32.018,-9.082)
  region: -34.702,-9.051 cw(c-34.202,-9.051) -34.202,-8.551 cw(c-34.202,-9.051) -33.702,-9.051 cw(c-34.202,-9.051) -34.202,-9.551 cw(c-34.202,-9.051)
  region: -45.452,-10.713 cw(c-44.952,-10.713) -44.952,-10.213 cw(c-44.952,-10.713) -44.452,-10.713 cw(c-44.952,-10.713) -44.952,-11.213 cw(c-44.952,-10.713)
  region: -42.183,-11.364 cw(c-41.683,-11.364) -41.683,-10.864 cw(c-41.683,-11.364) -41.183,-11.364 cw(c-41.683,-11.364) -41.683,-11.864 cw(c-41.683,-11.364)
  region net GND: -57.371,-6.66 cw(c-56.871,-6.66) -56.871,-6.16 cw(c-56.871,-6.66) -56.371,-6.66 cw(c-56.871,-6.66) -56.871,-7.16 cw(c-56.871,-6.66)
  region net VDD: -58.622,-4.813 cw(c-58.122,-4.813) -58.122,-4.313 cw(c-58.122,-4.813) -57.622,-4.813 cw(c-58.122,-4.813) -58.122,-5.313 cw(c-58.122,-4.813)
  region net GND: -45.232,-6.775 cw(c-44.732,-6.775) -44.732,-6.275 cw(c-44.732,-6.775) -44.232,-6.775 cw(c-44.732,-6.775) -44.732,-7.275 cw(c-44.732,-6.775)
  region net SWDCLK_1: -44.526,-4.183 cw(c-44.026,-4.183) -44.026,-3.683 cw(c-44.026,-4.183) -43.526,-4.183 cw(c-44.026,-4.183) -44.026,-4.683 cw(c-44.026,-4.183)
  region net SWDIO_1: -44.588,-2.717 cw(c-44.088,-2.717) -44.088,-2.217 cw(c-44.088,-2.717) -43.588,-2.717 cw(c-44.088,-2.717) -44.088,-3.217 cw(c-44.088,-2.717)
  region net VIN: -60.125,-6.73 cw(c-59.625,-6.73) -59.625,-6.23 cw(c-59.625,-6.73) -59.125,-6.73 cw(c-59.625,-6.73) -59.625,-7.23 cw(c-59.625,-6.73)

## Silkscreen, mask and mechanical layers (free items; w line width, h text height)
Top Solder:
  rectangle: -53.778,3.414 -51.563,5.462
Dimensions:
  lines w0: -60.905,5.351 ccw(c-58.365,5.351) -58.365,2.811 -43.125,2.811 ccw(c-43.125,5.351) -40.585,5.351 -40.585,18.051 ccw(c-43.125,18.051) -43.125,20.591 -58.365,20.591 ccw(c-58.365,18.051) -60.905,18.051 -60.905,5.351
Mechanical 7:
  text "2v8" at -57.114,6.432 h0.86
  text "GPIO" at -52.394,6.432 h0.86
Top Component Center:
  text "AMG8833" at 18.348,6.606 h0.86

## Text inside footprints (layer, text, board x,y; h text height)
U1: Top Overlay "RefDes" at -41.26,-1.831 h1.27 r90; Top Overlay "REFDES" at -41.26,-2.148 h1.27 r90; Top 3D Body "RefDes2" at -41.26,-2.148 h1.27 r90
U2: Top Overlay "Designator9" at -56.805,-3.784 h1.27 r180
U4: Top Overlay "RefDes" at -32.722,-6.458 h1.27 r90; Top Overlay "REFDES" at -32.722,-6.776 h1.27 r90; Top 3D Body "RefDes2" at -32.722,-6.776 h1.27 r90